# Altium PCB Chip Reader PCB.PcbDoc (part 2 of 2)
Units mm, origin at the board's own origin, x right, y up, seen from the top; angles counter-clockwise.
Board outline 155.1 x 69 mm, 2 copper layers (Top Layer, Bottom Layer), stack 1.6 mm thick; 129 components, 123 nets, 435 pads, 207 vias.
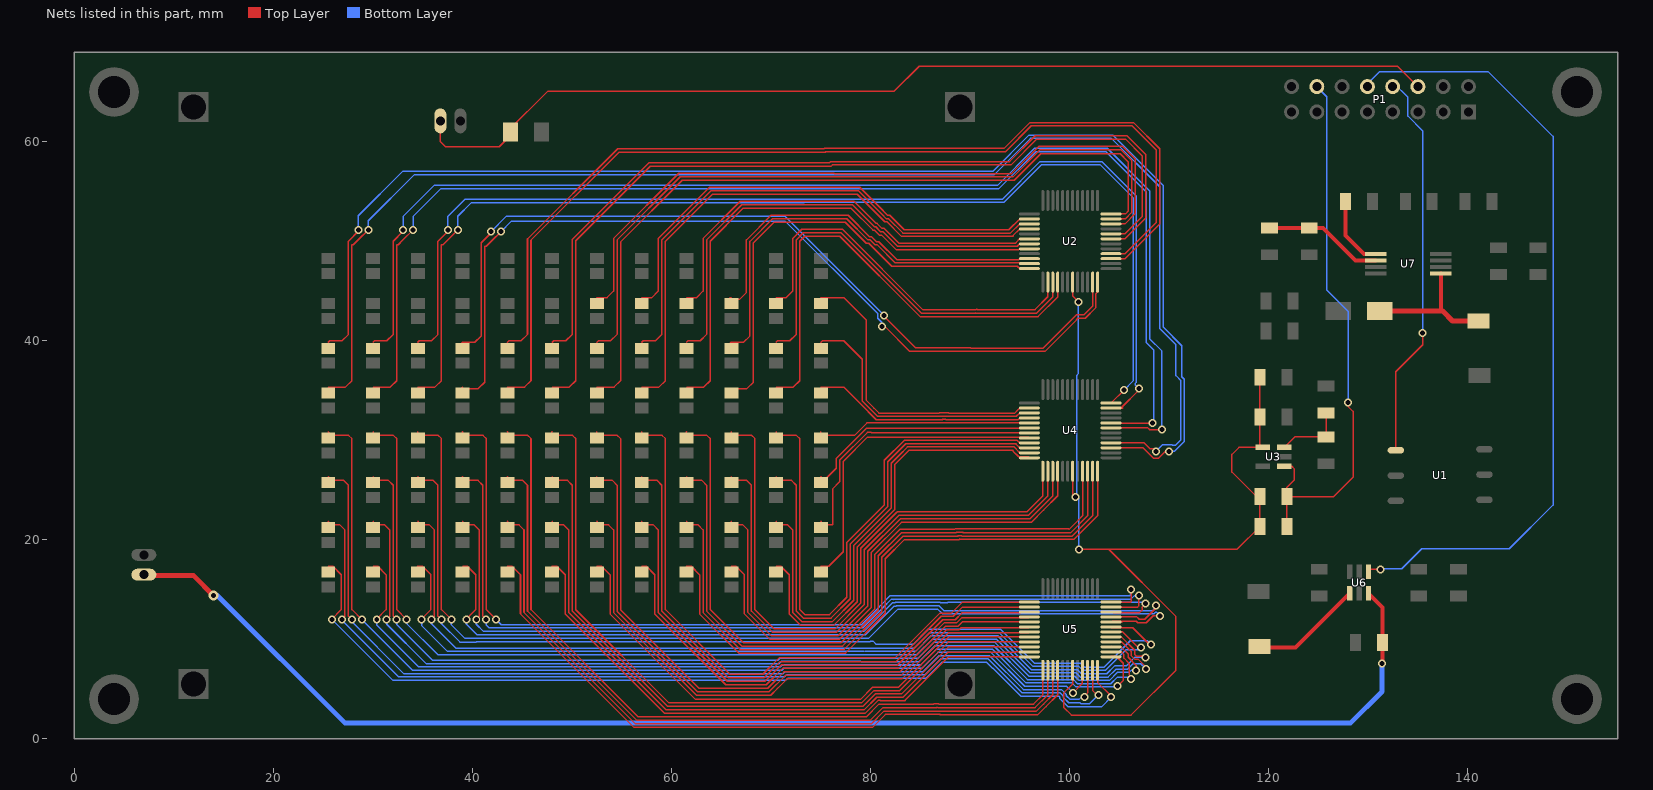
[diagram p2: the nets of this part, all layers, seen from the top]

## Via types
v1: diameter 0.8, hole 0.5, Top Layer to Bottom Layer, 201 vias
v2: diameter 1.27, hole 0.711, Top Layer to Bottom Layer, 4 vias
v3: diameter 1, hole 0.5, Top Layer to Bottom Layer, 2 vias

## Nets (pads, with @x,y where several pads share a name; then routed paths per layer and width w, separated by ;. In a path a pad name is that pad's centre, name@x,y a point inside that pad or via, vN(x,y) a via of type N, cw(c..) or ccw(c..) an arc to the next point about the centre after c; other vN are vias at no path point) (continued)
NetD19_2: D19.2 U2.10 | length 72.4
  Top Layer w0.152: 52.525,44.348 53.545,44.348 54.195,44.998 54.195,50.144 54.195,50.29 60.739,56.834 76.339,56.834 76.373,56.8 94.187,56.8 96.937,59.551 105.342,59.551 106.603,58.29 106.603,52.776 105.575,51.748 U2.10@104.175,51.748
NetD20_2: D20.2 U2.26 | length 48.9
  Top Layer w0.152: 57.025,44.348 58.045,44.348 58.695,44.998 58.695,50.144 58.695,50.29 63.831,55.426 78.94,55.426 81.301,53.066 81.301,53.037 81.498,52.84 81.718,52.62 81.942,52.62 83.406,51.156 93.908,51.156 95,52.248 U2.26@95.975,52.248
NetD21_2: D21.2 U2.30 | length 43.5
  Top Layer w0.152: 61.525,44.348 62.545,44.348 63.195,44.998 63.195,50.144 ; 63.195,50.144 63.195,50.29 66.923,54.018 78.357,54.018 80.583,51.792 80.668,51.792 81.168,51.292 81.392,51.292 82.856,49.828 94.61,49.828 94.67,49.888 94.67,49.918 95,50.248 U2.30@95.975,50.248
NetD22_2: D22.2 U2.34 | length 38.7
  Top Layer w0.152: 65.863,44.348 66.025,44.348 ; D22.2@65.875,44.198 66.895,44.198 67.545,44.848 67.545,49.994 67.545,50.14 70.015,52.61 77.774,52.61 79.92,50.464 80.118,50.464 80.618,49.964 80.842,49.964 82.642,48.164 94.916,48.164 95,48.248 U2.34@95.975,48.248
NetD23_2: D23.2 U2.38 | length 38.6
  Top Layer w0.152: 70.525,44.348 71.545,44.348 72.195,44.998 72.195,50.144 72.195,50.29 73.107,51.202 77.191,51.202 85.247,43.146 90.646,43.146 90.653,43.153 90.747,43.153 90.747,43.146 96.545,43.146 ; 96.575,43.146 96.545,43.146 ; U2.38@97.825,45.898 97.825,44.426 96.545,43.146
NetD24_2: D24.2 U4.26 | length 30.8
  Top Layer w0.152: 75.025,44.348 77.321,44.348 79.603,42.066 79.603,34.005 80.304,33.304 ; 80.36,33.248 80.304,33.304 ; U4.26@95.975,33.248 95,33.248 94.67,32.918 94.67,32.888 94.526,32.744 87.865,32.744 87.841,32.768 86.959,32.768 86.935,32.744 80.864,32.744 80.304,33.304
NetD25_2: D25.2 U4.3 | length 136.1
  Top Layer w0.152: 25.525,39.848 25.675,39.998 26.899,39.998 27.547,40.646 27.547,49.998 28.549,51 v1(28.549,51.148) ; U4.3@104.176,29.25 107.393,29.248 108.419,28.222 108.979,28.222 109.655,28.898 v1(109.999,28.898)
  Bottom Layer w0.152: v1(28.549,51.148) 28.549,52.568 32.999,57.018 92.292,57.018 95.942,60.667 104.358,60.667 109.419,55.607 109.419,41.666 109.419,41.382 111.295,39.506 111.295,36.38 111.538,36.137 111.538,29.884 110.553,28.898 v1(109.999,28.898)
NetD26_2: D26.2 U4.7 | length 123.9
  Top Layer w0.152: 30.025,39.848 30.175,39.998 31.399,39.998 32.047,40.646 32.047,49.998 33.049,51 v1(33.049,51.148) ; U4.7@104.175,31.248 107.893,31.248 108.069,31.072 109.273,31.072 v1(109.299,31.098)
  Bottom Layer w0.152: v1(33.049,51.148) 33.049,52.498 36.161,55.61 92.762,55.61 96.492,59.339 103.808,59.339 108.06,55.088 108.06,40.209 109.299,38.97 v1(109.299,31.098)
NetD27_2: D27.2 U4.11 | length 111.1
  Top Layer w0.152: 34.525,39.848 34.675,39.998 35.899,39.998 36.547,40.646 36.547,49.998 37.549,51 v1(37.549,51.148) ; U4.11@104.175,33.248 105.375,33.248 105.301,33.322 105.251,33.322 106.999,35.07 v1(106.999,35.198)
  Bottom Layer w0.152: v1(37.549,51.148) 37.549,52.526 39.255,54.232 93.262,54.232 97.042,58.011 103.258,58.011 106.732,54.538 106.732,35.835 106.603,35.706 106.603,35.594 v1(106.999,35.198)
NetD28_2: D28.2 U2.47 | length 84
  Top Layer w0.152: D28.2@38.875,39.698 39.025,39.848 40.249,39.848 40.897,40.496 40.897,49.848 41.899,50.85 v1(41.899,50.998) ; v1(81.389,42.548) 81.389,42.448 84.543,39.294 89.994,39.294 90,39.3 90.037,39.3 90.069,39.268 97.371,39.268 97.397,39.294 100.645,42.542 100.705,42.602 101.446,42.602 102.325,43.481 U2.47@102.325,45.898
  Bottom Layer w0.152: v1(41.899,50.998) 43.399,52.498 71.439,52.498 v1(81.389,42.548)
NetD29_2: D29.2 U2.3 | length 95.3
  Top Layer w0.152: 43.525,39.848 43.675,39.998 44.899,39.998 45.547,40.646 45.547,49.998 45.547,50.236 54.61,59.298 75.319,59.298 75.359,59.338 93.438,59.338 96.034,61.934 106.443,61.934 109.067,59.31 109.067,51.74 105.575,48.248 U2.3@104.175,48.248
NetD30_2: D30.2 U2.7 | length 85.3
  Top Layer w0.152: 48.025,39.848 48.175,39.998 49.399,39.998 50.047,40.646 50.047,49.998 50.047,50.176 57.761,57.89 75.902,57.89 76.022,58.01 93.988,58.01 96.576,60.598 105.788,60.598 107.659,58.727 107.659,52.332 105.575,50.248 U2.7@104.175,50.248
NetD31_2: D31.2 U2.11 | length 75.3
  Top Layer w0.152: 52.525,39.848 52.675,39.998 53.899,39.998 54.547,40.646 54.547,49.998 54.547,50.144 60.885,56.482 76.222,56.482 76.236,56.468 94.324,56.468 97.055,59.199 105.196,59.199 106.251,58.144 106.251,52.894 105.605,52.248 U2.11@104.175,52.248
NetD32_2: D32.2 U2.27 | length 53
  Top Layer w0.152: 57.025,39.848 57.175,39.998 58.399,39.998 59.047,40.646 59.047,49.998 59.047,50.144 63.977,55.074 78.794,55.074 81.135,52.734 81.58,52.288 81.805,52.288 83.269,50.824 94.076,50.824 95,51.748 U2.27@95.975,51.748
NetD33_2: D33.2 U2.31 | length 47.6
  Top Layer w0.152: 61.525,39.848 61.675,39.998 62.899,39.998 63.547,40.646 63.547,49.998 63.547,50.144 67.069,53.666 78.211,53.666 80.139,51.738 80.417,51.46 80.53,51.46 81.03,50.96 81.255,50.96 82.719,49.496 94.748,49.496 95,49.748 U2.31@95.975,49.748
NetD34_2: D34.2 U2.35 | length 42.7
  Top Layer w0.152: D34.2@65.875,39.698 66.025,39.848 67.249,39.848 67.897,40.496 67.897,49.848 67.897,49.994 70.161,52.258 77.628,52.258 79.754,50.132 79.98,50.132 80.48,49.632 80.705,49.632 82.505,47.832 95.891,47.832 U2.35@95.975,47.748
NetD35_2: D35.2 U2.39 | length 43.4
  Top Layer w0.152: 70.525,39.848 70.675,39.998 71.899,39.998 72.547,40.646 72.547,49.998 72.547,50.144 73.253,50.85 77.045,50.85 85.101,42.794 90.594,42.794 90.6,42.8 ; 90.601,42.799 90.601,42.794 96.399,42.794 96.721,42.794 98.325,44.398 U2.39@98.325,45.898
NetD36_2: D36.2 U4.27 | length 26.8
  Top Layer w0.152: 75.025,39.848 75.175,39.998 77.321,39.998 79.175,38.144 79.175,33.963 79.271,33.868 80.727,32.412 87.073,32.412 87.097,32.436 87.703,32.436 87.727,32.412 94.664,32.412 95,32.748 U4.27@95.975,32.748
NetD37_2: D37.2 U4.4 | length 138.6
  Top Layer w0.152: 25.525,35.348 27.249,35.348 27.899,35.998 27.899,49.648 28.049,49.648 28.549,50.148 v1(29.549,51.148) ; U4.4@104.175,29.748 107.495,29.748 108.073,29.17 108.427,29.17 v1(108.699,28.898)
  Bottom Layer w0.152: v1(29.549,51.148) 29.549,52.069 34.146,56.666 92.41,56.666 96.079,60.335 104.221,60.335 109.067,55.489 109.067,41.52 109.067,41.237 110.699,39.605 110.699,36.507 111.175,36.031 111.175,30.018 110.679,29.522 110.331,29.522 110.279,29.574 109.375,29.574 v1(108.699,28.898)
NetD38_2: D38.2 U4.8 | length 125.7
  Top Layer w0.152: 30.025,35.348 31.749,35.348 32.399,35.998 32.399,49.648 32.549,49.648 33.049,50.148 v1(34.049,51.148) ; U4.8@104.175,31.748 104.203,31.72 108.321,31.72 v1(108.349,31.748)
  Bottom Layer w0.152: v1(34.049,51.148) 34.049,52.498 36.809,55.258 92.88,55.258 96.629,59.007 103.671,59.007 107.728,54.95 107.728,39.837 108.475,39.09 108.475,31.874 v1(108.349,31.748)
NetD39_2: D39.2 U4.12 | length 112.9
  Top Layer w0.152: 34.525,35.348 36.249,35.348 36.899,35.998 36.899,49.648 37.049,49.648 37.549,50.148 v1(38.549,51.148) ; U4.12@104.175,33.748 v1(105.499,35.072)
  Bottom Layer w0.152: v1(38.549,51.148) 38.549,52.526 39.873,53.85 73.341,53.85 73.391,53.9 93.4,53.9 97.179,57.679 103.121,57.679 106.4,54.4 106.4,35.973 v1(105.499,35.072)
NetD40_2: D40.2 U2.48 | length 89.7
  Top Layer w0.152: 39.025,35.348 38.875,35.198 40.599,35.198 41.249,35.848 41.249,49.498 41.399,49.498 41.899,49.998 v1(42.899,50.998) ; v1(81.149,41.438) 81.459,41.438 83.961,38.936 97.537,38.936 100.697,42.096 100.697,42.124 100.843,42.27 101.583,42.27 102.657,43.344 102.657,44.726 102.825,44.894 U2.48@102.825,45.898
  Bottom Layer w0.152: v1(42.899,50.998) 43.899,51.998 71.469,51.998 80.733,42.734 80.733,42.276 81.149,41.86 v1(81.149,41.438) 81.332,41.438 81.367,41.473 v1@81.367,41.643
NetD41_2: D41.2 U2.4 | length 98.5
  Top Layer w0.152: 43.525,35.348 45.249,35.348 45.899,35.998 45.899,50.118 54.727,58.946 75.465,58.946 75.525,59.006 93.576,59.006 96.172,61.602 106.277,61.602 108.715,59.164 108.715,51.888 105.575,48.748 U2.4@104.175,48.748
NetD42_2: D42.2 U2.8 | length 88.5
  Top Layer w0.152: 48.025,35.348 49.749,35.348 50.399,35.998 50.399,50.058 57.879,57.538 76.048,57.538 76.188,57.678 94.126,57.678 96.714,60.266 105.622,60.266 107.307,58.581 107.307,52.48 105.575,50.748 U2.8@104.175,50.748
NetD43_2: D43.2 U2.12 | length 78.4
  Top Layer w0.152: 52.525,35.348 54.249,35.348 54.899,35.998 54.899,49.938 61.091,56.13 94.456,56.13 97.124,58.798 105.099,58.798 105.899,57.998 105.899,53.011 105.636,52.748 U2.12@104.176,52.75
NetD44_2: D44.2 U2.28 | length 57.3
  Top Layer w0.152: 57.025,35.348 58.749,35.348 59.399,35.998 59.399,49.998 59.419,49.998 64.143,54.722 78.677,54.722 81.443,51.956 81.667,51.956 83.131,50.492 94.305,50.492 94.338,50.525 94.338,50.586 95,51.248 U2.28@95.975,51.248
NetD45_2: D45.2 U2.32 | length 51.9
  Top Layer w0.152: 61.525,35.348 63.249,35.348 63.899,35.998 63.899,50.008 67.205,53.314 78.065,53.314 80.251,51.128 80.393,51.128 80.893,50.628 81.117,50.628 82.581,49.164 94.916,49.164 95,49.248 U2.32@95.975,49.248
NetD46_2: D46.2 U2.36 | length 47.8
  Top Layer w0.152: D46.2@65.875,35.198 67.599,35.198 68.249,35.848 68.249,49.848 68.259,49.848 70.317,51.906 77.482,51.906 79.588,49.8 79.843,49.8 82.143,47.5 94.752,47.5 94.908,47.344 96.49,47.344 U2.36@96.586,47.248
NetD47_2: D47.2 U2.40 | length 48.5
  Top Layer w0.152: 70.525,35.348 72.249,35.348 72.899,35.998 72.899,49.998 73.399,50.498 76.927,50.498 84.995,42.43 90.47,42.43 90.5,42.4 90.5,42.425 90.495,42.43 96.855,42.43 98.825,44.401 U2.40@98.825,45.898
NetD48_2: D48.2 U4.28 | length 22.4
  Top Layer w0.152: 75.025,35.348 77.321,35.348 78.899,33.77 80.589,32.08 87.21,32.08 87.234,32.104 87.566,32.104 87.59,32.08 94.832,32.08 95,32.248 U4.28@95.975,32.248
NetD49_2: D49.2 U5.45 | length 99.9
  Top Layer w0.152: 25.525,30.848 25.875,30.498 27.575,30.498 27.899,30.174 27.899,12.998 v1(28.899,11.998) ; v1(100.346,4.619) 101.299,5.572 101.299,6.872 U5.45@101.325,6.898
  Bottom Layer w0.152: v1(28.899,11.998) 33.995,6.902 71.108,6.902 71.3,7.094 85.185,7.094 86.787,8.696 92.113,8.696 95.513,5.296 99.704,5.296 100.346,4.654 v1(100.346,4.619)
NetD50_2: D50.2 U5.4 | length 105.4
  Top Layer w0.152: 30.025,30.848 30.049,30.848 30.049,30.498 32.075,30.498 32.399,30.174 32.399,12.998 v1(33.399,11.998) ; U5.4@104.175,9.748 104.225,9.698 105.302,9.698 106.232,8.768 106.232,8.338 106.59,7.98 106.929,7.98 107.689,7.22 v1(107.689,7.038)
  Bottom Layer w0.152: v1(33.399,11.998) 33.399,11.608 36.553,8.454 84.667,8.454 86.237,10.024 92.663,10.024 96.063,6.624 100.677,6.624 101.087,6.214 103.878,6.214 104.67,7.006 105.846,7.006 106.39,7.55 107.177,7.55 v1(107.689,7.038)
NetD51_2: D51.2 U5.8 | length 102.9
  Top Layer w0.152: 34.525,30.848 34.52,30.848 34.52,30.498 36.575,30.498 36.899,30.174 36.899,12.998 v1(37.899,11.998) ; U5.8@104.175,11.748 105.375,11.748 105.325,11.798 104.299,11.798 104.323,11.822 106.721,11.822 106.873,11.67 107.725,11.67 108.423,12.368 v1(109.109,12.368)
  Bottom Layer w0.152: v1(37.899,11.998) 37.899,11.458 39.267,10.09 79.301,10.09 79.311,10.1 79.813,10.1 82.765,13.052 86.748,13.052 87.234,12.566 108.506,12.566 108.683,12.742 108.735,12.742 v1(109.109,12.368)
NetD52_2: D52.2 U5.12 | length 90.6
  Top Layer w0.152: 39.025,30.848 39.016,30.848 39.016,30.476 39.041,30.476 39.063,30.498 41.075,30.498 41.399,30.174 41.399,12.998 v1(42.399,11.998) ; U5.12@104.175,13.748 106.149,13.748 106.219,13.818 106.219,14.978 v1@106.189,15.008
  Bottom Layer w0.152: v1(42.399,11.998) 42.919,11.478 79.101,11.478 80.904,13.281 80.904,13.313 81.971,14.38 87.48,14.38 87.5,14.4 87.503,14.397 87.503,14.38 106.051,14.38 106.219,14.548 106.219,14.978 v1@106.189,15.008
  other v1: 106.189,15.008
NetD53_2: D53.2 U5.37 | length 79.3
  Top Layer w0.152: 43.525,30.848 43.562,30.848 43.562,30.498 45.575,30.498 45.899,30.174 45.899,12.998 56.685,2.212 79.587,2.212 80.873,3.498 80.875,3.5 80.9,3.5 80.902,3.498 86.373,3.498 86.407,3.532 86.839,3.532 86.873,3.498 96.399,3.498 97.325,4.424 U5.37@97.325,6.898
NetD54_2: D54.2 U5.33 | length 72.1
  Top Layer w0.152: 48.025,30.848 48.007,30.848 48.007,30.498 50.075,30.498 50.399,30.174 50.399,12.988 59.767,3.62 79.117,3.62 80.354,4.857 82.957,4.857 87.848,9.748 U5.33@95.975,9.748
NetD55_2: D55.2 U5.29 | length 67.2
  Top Layer w0.152: 52.525,30.848 52.503,30.848 52.503,30.476 52.554,30.476 52.575,30.498 54.575,30.498 54.899,30.174 54.899,12.978 62.787,5.09 69.68,5.09 71.318,6.728 82.95,6.728 87.542,11.32 88.799,11.32 89.227,11.748 U5.29@95.975,11.748
NetD56_2: D56.2 U5.25 | length 62.3
  Top Layer w0.152: 57.025,30.848 57.05,30.848 57.05,30.498 59.075,30.498 59.399,30.174 59.399,12.998 65.899,6.498 69.182,6.498 70.82,8.136 82.48,8.136 86.992,12.648 88.148,12.648 89.248,13.748 U5.25@95.975,13.748
NetD57_2: D57.2 U4.45 | length 71.8
  Top Layer w0.152: 61.525,30.848 61.52,30.848 61.52,30.498 63.575,30.498 63.899,30.174 63.899,12.998 67.215,9.682 77.065,9.682 80.447,13.064 80.447,18.539 82.954,21.046 82.962,21.054 88.462,21.054 88.504,21.096 99.913,21.096 99.955,21.054 100.899,21.998 101.325,22.424 U4.45@101.325,26.898
NetD58_2: D58.2 U4.37 | length 61.1
  Top Layer w0.152: 66.025,30.848 66.016,30.848 66.016,30.476 66.041,30.476 66.063,30.498 68.075,30.498 68.399,30.174 68.399,12.988 70.297,11.09 76.482,11.09 79.039,13.647 79.039,19.147 82.66,22.768 ; 82.704,22.812 82.66,22.768 ; U4.37@97.325,26.898 97.325,24.417 95.719,22.812 82.732,22.812 82.66,22.74 82.66,22.768
NetD59_2: D59.2 U4.33 | length 56.5
  Top Layer w0.152: 70.525,30.848 70.562,30.848 70.562,30.498 72.575,30.498 72.899,30.174 72.899,12.998 73.399,12.498 75.899,12.498 77.631,14.23 77.631,19.73 81.399,23.498 81.399,27.998 83.397,29.996 94.756,29.996 95.004,29.748 U4.33@95.975,29.748
NetD60_2: D60.2 U4.29 | length 21.9
  Top Layer w0.152: 75.025,30.848 75.007,30.848 75.007,30.498 78.399,30.498 79.649,31.748 81.91,31.748 87.348,31.748 87.372,31.772 87.386,31.772 87.41,31.748 U4.29@95.975,31.748
NetD61_2: D61.2 U5.46 | length 97.8
  Top Layer w0.152: 25.525,26.348 25.875,25.998 27.075,25.998 27.075,25.97 27.547,25.498 27.547,12.35 v1(27.899,11.998) ; v1(101.5,4.2) 101.4,4.2 101.825,4.625 U5.46@101.825,6.898
  Bottom Layer w0.152: v1(27.899,11.998) 27.899,11.768 33.097,6.57 71.245,6.57 71.437,6.762 85.323,6.762 86.925,8.364 91.975,8.364 95.375,4.964 99.198,4.964 99.69,4.472 99.69,4.347 100.074,3.963 100.963,3.963 101.3,4.3 v1@101.5,4.3
NetD62_2: D62.2 U5.3 | length 99.5
  Top Layer w0.152: 30.025,26.348 30.049,26.348 30.049,25.998 31.575,25.998 31.575,25.97 32.047,25.498 32.047,12.35 v1(32.399,11.998) ; U5.3@104.212,9.285 U5.3@104.249,9.248 ; U5.3@104.211,9.286 104.199,9.298 104.175,9.274 U5.3@104.176,9.25 U5.3@104.249,9.248 ; v1(106.709,6.894) 106.721,6.906 106.721,7.379 105.9,8.2 105.9,8.538 105.19,9.248 U5.3@104.249,9.248
  Bottom Layer w0.152: v1(32.399,11.998) 32.399,11.498 35.999,7.898 70.695,7.898 70.909,8.112 79.207,8.112 79.207,8.107 79.2,8.1 84.783,8.1 86.375,9.692 92.525,9.692 95.925,6.292 100.539,6.292 100.949,5.882 104.016,5.882 104.808,6.674 105.984,6.674 106.226,6.916 106.721,6.916 106.721,6.906 v1(106.709,6.894)
NetD63_2: D63.2 U5.7 | length 97.2
  Top Layer w0.152: 34.525,26.348 34.545,26.348 34.545,25.998 36.075,25.998 36.075,25.97 36.547,25.498 36.547,12.35 v1(36.899,11.998) ; U5.7@104.175,11.248 104.249,11.174 106.367,11.174 108.119,9.422 108.183,9.422 108.199,9.438 v1(108.199,9.478)
  Bottom Layer w0.152: v1(36.899,11.998) 36.899,11.578 38.75,9.727 40.415,9.727 40.447,9.758 79.94,9.758 79.982,9.8 80.3,9.8 80.6,9.5 84.305,9.5 85.825,11.02 93.08,11.02 95.9,8.2 95.9,8.195 96.475,7.62 101.089,7.62 101.499,7.21 103.466,7.21 106.112,9.856 107.821,9.856 v1(108.199,9.478)
NetD64_2: D64.2 U5.11 | length 87.8
  Top Layer w0.152: 39.025,26.348 39.016,26.348 39.016,25.981 39.041,25.981 39.058,25.998 40.575,25.998 40.575,25.97 41.047,25.498 41.047,12.35 v1(41.399,11.998) ; U5.11@104.175,13.248 106.849,13.248 106.969,13.368 v1(106.969,14.398)
  Bottom Layer w0.152: v1(41.399,11.998) 41.399,11.458 41.711,11.146 79.238,11.146 81.236,13.144 81.236,13.175 82.109,14.048 82.352,14.048 ; 82.304,14 82.352,14.048 ; v1(106.969,14.398) 106.539,14.398 106.189,14.048 82.352,14.048
NetD65_2: D65.2 U5.38 | length 75.7
  Top Layer w0.152: 43.525,26.348 43.562,26.348 43.562,25.998 45.075,25.998 45.075,25.97 45.547,25.498 45.547,12.998 45.547,12.852 56.539,1.86 79.969,1.86 81.255,3.146 86.646,3.146 86.7,3.2 ; 86.701,3.2 86.755,3.146 96.545,3.146 97.825,4.426 U5.38@97.825,6.898
NetD66_2: D66.2 U5.34 | length 67.6
  Top Layer w0.152: 48.025,26.348 48.058,26.348 48.058,25.998 49.575,25.998 49.575,25.97 50.047,25.498 50.047,12.998 50.047,12.852 59.631,3.268 79.234,3.268 80.492,4.525 83.125,4.525 87.848,9.248 94.575,9.248 U5.34@95.975,9.248
NetD67_2: D67.2 U5.30 | length 62.8
  Top Layer w0.152: 52.525,26.348 52.503,26.348 52.503,25.981 52.554,25.981 52.571,25.998 54.075,25.998 54.075,25.97 54.547,25.498 54.547,12.998 54.547,12.83 62.639,4.738 69.826,4.738 71.464,6.376 83.067,6.376 87.679,10.988 88.937,10.988 89.105,11.156 95.883,11.156 U5.30@95.975,11.248
NetD68_2: D68.2 U5.26 | length 57.9
  Top Layer w0.152: 57.025,26.348 57.05,26.348 57.05,25.998 58.575,25.998 58.575,25.97 59.047,25.498 59.047,12.998 59.047,12.852 65.753,6.146 69.299,6.146 70.929,7.775 71.416,7.775 71.431,7.761 82.574,7.761 87.129,12.316 88.316,12.316 89.25,13.25 U5.26@95.976,13.25
NetD69_2: D69.2 U4.46 | length 68.1
  Top Layer w0.152: 61.525,26.348 61.545,26.348 61.545,25.998 63.075,25.998 63.075,25.97 63.547,25.498 63.547,12.998 63.547,12.852 67.069,9.33 77.211,9.33 80.799,12.918 80.799,18.394 83.107,20.702 ; 83.109,20.704 83.107,20.702 ; U4.46@101.825,26.898 101.825,22.426 100.103,20.704 89.335,20.704 89.275,20.764 88.669,20.764 88.605,20.7 88.6,20.7 88.598,20.702 83.107,20.702
NetD70_2: D70.2 U4.38 | length 57.3
  Top Layer w0.152: 66.025,26.348 66.016,26.348 66.016,25.981 66.041,25.981 66.059,25.998 67.575,25.998 67.575,25.97 68.047,25.498 68.047,12.998 68.047,12.852 70.161,10.738 76.628,10.738 79.391,13.501 79.391,19.001 82.85,22.46 82.87,22.48 88.33,22.48 88.35,22.46 95.865,22.46 97.825,24.42 U4.38@97.825,26.898
NetD71_2: D71.2 U4.34 | length 52.3
  Top Layer w0.152: 70.525,26.348 70.562,26.348 70.562,25.998 72.075,25.998 72.075,25.97 72.547,25.498 72.547,12.998 72.547,12.852 73.253,12.146 76.045,12.146 77.983,14.084 77.983,19.584 81.751,23.352 81.751,27.852 82.648,28.749 83.563,29.664 94.618,29.664 94.67,29.612 94.67,29.582 95.004,29.248 U4.34@95.975,29.248
NetD72_2: D72.2 U4.30 | length 24.1
  Top Layer w0.152: 75.025,26.348 75.058,26.348 75.058,25.998 75.375,25.998 76.517,27.14 76.575,27.14 76.575,28.176 79.637,31.238 95.965,31.238 U4.30@95.975,31.248
NetD73_2: D73.2 U5.47 | length 95.5
  Top Layer w0.152: 25.525,21.848 25.875,21.498 26.695,21.498 27.195,20.998 27.195,12.294 v1(26.899,11.998) ; U5.47@102.326,6.9 102.326,4.874 102.9,4.3 v1(102.9,4.4)
  Bottom Layer w0.152: v1(26.899,11.998) 26.899,11.918 32.579,6.238 71.383,6.238 71.575,6.43 85.46,6.43 87.062,8.032 91.838,8.032 95.238,4.632 99.06,4.632 99.358,4.334 99.358,4.209 99.937,3.631 101.069,3.631 101.156,3.544 102.044,3.544 v1(102.9,4.4)
NetD74_2: D74.2 U5.2 | length 95.2
  Top Layer w0.152: 30.025,21.848 30.049,21.848 30.049,21.498 31.195,21.498 31.695,20.998 31.695,12.294 v1(31.399,11.998) ; U5.2@104.175,8.748 105.22,8.748 105.482,8.486 105.482,8.118 105.999,7.601 105.999,6.418 106.199,6.218 v1(106.199,6.018)
  Bottom Layer w0.152: v1(31.399,11.998) 31.399,11.528 35.361,7.566 70.833,7.566 71.047,7.78 79.05,7.78 79.062,7.768 84.92,7.768 86.512,9.36 92.388,9.36 95.788,5.96 100.402,5.96 100.812,5.55 104.153,5.55 104.821,6.218 106.199,6.218 v1(106.199,6.018)
NetD75_2: D75.2 U5.6 | length 91.6
  Top Layer w0.152: 34.525,21.848 34.545,21.848 34.545,21.498 35.695,21.498 36.195,20.998 36.195,12.294 v1(35.899,11.998) ; U5.6@104.175,10.748 105.349,10.748 107.019,9.078 107.133,9.078 107.2,9.145 v1(107.2,9.2) ; v1(107.2,9.2) 107.119,9.12 v1(107.2,9.2)
  Bottom Layer w0.152: v1(35.899,11.998) 35.899,11.568 38.349,9.118 84.392,9.118 85.962,10.688 92.938,10.688 96.338,7.288 100.952,7.288 101.362,6.878 103.603,6.878 105.693,8.968 107.023,8.968 107.2,9.145 v1(107.2,9.2) ; v1(107.2,9.2) 107.119,9.12 v1(107.2,9.2)
NetD76_2: D76.2 U5.10 | length 84.7
  Top Layer w0.152: 39.025,21.848 39.041,21.848 39.041,21.498 40.195,21.498 40.695,20.998 40.695,12.294 v1(40.399,11.998) ; U5.10@104.176,12.75 104.349,12.748 104.399,12.698 107.048,12.698 107.338,12.988 107.338,13.169 107.289,13.218 107.629,13.558 v1(107.629,13.628)
  Bottom Layer w0.152: v1(40.399,11.998) 40.399,11.518 41.123,10.794 79.066,10.794 79.068,10.796 79.358,10.796 81.568,13.006 81.568,13.038 82.198,13.668 82.442,13.668 82.49,13.716 87.023,13.716 87.039,13.7 87.762,13.7 87.778,13.716 ; 87.8,13.716 107.541,13.716 v1(107.629,13.628)
NetD77_2: D77.2 U5.39 | length 73
  Top Layer w0.152: 43.525,21.848 43.562,21.848 43.562,21.498 44.695,21.498 45.195,20.998 45.195,12.852 45.195,12.706 56.393,1.508 80.087,1.508 81.379,2.8 81.4,2.8 81.406,2.794 96.691,2.794 97.397,3.5 97.401,3.5 98.329,4.428 98.329,5.628 ; 98.325,4.572 U5.39@98.325,6.898
NetD78_2: D78.2 U5.35 | length 63.3
  Top Layer w0.152: 48.025,21.848 48.058,21.848 48.058,21.498 49.195,21.498 49.695,20.998 49.695,12.852 49.695,12.706 59.485,2.916 79.352,2.916 80.629,4.193 81.116,4.193 81.122,4.188 83.288,4.188 87.8,8.7 94.6,8.7 94.6,8.723 94.575,8.748 U5.35@95.975,8.748
NetD79_2: D79.2 U5.31 | length 58.4
  Top Layer w0.152: 52.525,21.848 52.554,21.848 52.554,21.498 53.695,21.498 54.195,20.998 54.195,12.852 54.195,12.706 62.515,4.386 69.986,4.386 70.657,5.057 70.657,5.071 71.61,6.024 83.185,6.024 87.817,10.656 95.883,10.656 U5.31@95.975,10.748
NetD80_2: D80.2 U5.27 | length 53.6
  Top Layer w0.152: 57.025,21.848 57.05,21.848 57.05,21.498 58.195,21.498 58.695,20.998 58.695,12.852 58.695,12.706 65.607,5.794 69.417,5.794 71.067,7.443 71.279,7.443 71.31,7.412 82.695,7.412 87.267,11.984 88.524,11.984 89.196,12.656 95.056,12.656 95.15,12.75 U5.27@95.976,12.75
NetD81_2: D81.2 U4.47 | length 64.5
  Top Layer w0.152: 61.525,21.848 61.545,21.848 61.545,21.498 62.695,21.498 63.195,20.998 63.195,12.852 ; 63.195,12.852 63.195,12.706 66.923,8.978 77.357,8.978 81.151,12.772 81.151,18.248 83.271,20.368 88.771,20.368 88.835,20.432 89.138,20.432 89.198,20.372 100.269,20.372 102.325,22.428 U4.47@102.325,26.898
NetD82_2: D82.2 U4.39 | length 53.6
  Top Layer w0.152: 66.025,21.848 66.041,21.848 66.041,21.498 67.195,21.498 67.695,20.998 67.695,12.852 67.695,12.706 70.015,10.386 76.774,10.386 79.743,13.355 79.743,18.855 82.996,22.108 96.011,22.108 98.325,24.422 U4.39@98.325,26.898
NetD83_2: D83.2 U4.35 | length 48.1
  Top Layer w0.152: 70.525,21.848 70.562,21.848 70.562,21.498 71.695,21.498 72.195,20.998 72.195,12.852 72.195,12.706 73.107,11.794 76.191,11.794 78.335,13.938 78.335,19.438 82.103,23.206 82.103,27.706 82.897,28.5 83.729,29.332 94.45,29.332 94.67,29.112 94.67,29.082 95.004,28.748 U4.35@95.975,28.748
NetD84_2: D84.2 U4.31 | length 28.6
  Top Layer w0.152: 75.025,21.848 75.058,21.848 75.058,21.498 76.195,21.498 76.195,25.12 76.927,25.852 76.927,28.03 79.697,30.8 80.096,30.8 80.148,30.748 U4.31@95.975,30.748
NetD85_2: D85.2 U5.48 | length 93.7
  Top Layer w0.152: 25.525,17.348 25.993,17.348 26.843,16.498 26.843,12.998 25.899,12.054 v1(25.899,11.998) ; U5.48@102.826,6.9 102.826,5.674 104.2,4.3 v1(104.2,4.2)
  Bottom Layer w0.152: v1(25.899,11.998) 31.991,5.906 71.52,5.906 71.712,6.098 85.598,6.098 87.2,7.7 91.662,7.7 92.272,7.09 92.31,7.09 95.1,4.3 98.923,4.3 99.026,4.197 99.026,4.072 99.886,3.212 103.212,3.212 v1(104.2,4.2)
NetD86_2: D86.2 U5.1 | length 89.9
  Top Layer w0.152: 30.025,17.348 30.493,17.348 31.343,16.498 31.343,12.998 30.399,12.054 v1(30.399,11.998) ; U5.1@104.175,8.298 104.699,8.298 105.399,7.598 105.399,5.868 v1(104.849,5.318)
  Bottom Layer w0.152: v1(30.399,11.998) 30.399,11.458 34.623,7.234 70.97,7.234 71.162,7.426 85.048,7.426 86.65,9.028 92.25,9.028 95.65,5.628 100.264,5.628 100.674,5.218 104.447,5.218 104.703,5.474 104.833,5.474 104.849,5.458 v1(104.849,5.318)
NetD87_2: D87.2 U5.5 | length 88.5
  Top Layer w0.152: 34.469,17.348 34.993,17.348 35.843,16.498 35.843,12.998 34.899,12.054 v1(34.899,11.998) ; U5.5@104.175,10.248 105.222,10.248 106.564,8.906 106.564,8.475 106.727,8.312 107.271,8.312 107.307,8.348 107.489,8.348 v1(107.639,8.198)
  Bottom Layer w0.152: v1(34.899,11.998) 34.899,11.388 37.501,8.786 79.4,8.786 ; 79.472,8.786 84.53,8.786 86.1,10.356 92.8,10.356 96.2,6.956 100.814,6.956 101.224,6.546 103.741,6.546 104.533,7.338 105.709,7.338 106.599,8.228 107.609,8.228 v1(107.639,8.198)
NetD88_2: D88.2 U5.9 | length 84
  Top Layer w0.152: 39.025,17.348 39.493,17.348 40.343,16.498 40.343,12.998 39.399,12.054 v1(39.399,11.998) ; U5.9@104.176,12.25 104.249,12.248 U5.9@104.212,12.285 ; U5.9@104.211,12.285 104.199,12.298 106.743,12.298 107.019,12.022 107.579,12.022 108.679,13.122 v1(108.679,13.398)
  Bottom Layer w0.152: v1(39.399,11.998) 39.399,11.548 40.505,10.442 79.184,10.442 79.206,10.464 79.495,10.464 82.367,13.336 82.579,13.336 82.627,13.384 86.886,13.384 87.372,12.898 108.369,12.898 108.679,13.208 v1(108.679,13.398)
NetD89_2: D89.2 U5.40 | length 68.2
  Top Layer w0.152: 43.525,17.348 43.993,17.348 44.843,16.498 44.843,12.561 56.248,1.156 80.204,1.156 81.51,2.462 87,2.462 87,2.452 86.99,2.442 96.836,2.442 97.646,3.251 98.825,4.431 U5.40@98.825,6.898
NetD90_2: D90.2 U5.36 | length 58.1
  Top Layer w0.152: 47.976,17.348 48.493,17.348 49.343,16.498 49.343,12.561 59.34,2.564 79.469,2.564 80.767,3.861 80.979,3.861 80.984,3.856 83.5,3.856 83.5,3.9 87.848,8.248 U5.36@95.259,8.248
NetD91_2: D91.2 U5.32 | length 53.9
  Top Layer w0.152: 52.525,17.348 52.993,17.348 53.843,16.498 53.843,12.561 62.432,3.972 78.999,3.972 80.216,5.189 82.82,5.189 87.878,10.248 U5.32@95.975,10.248
NetD92_2: D92.2 U5.28 | length 49
  Top Layer w0.152: 57.025,17.348 57.493,17.348 58.343,16.498 58.343,12.561 65.462,5.442 69.535,5.442 71.173,7.08 82.832,7.08 87.404,11.652 88.662,11.652 89.166,12.156 95.883,12.156 U5.28@95.975,12.248
NetD93_2: D93.2 U4.48 | length 60.8
  Top Layer w0.152: 61.482,17.348 61.993,17.348 62.843,16.498 62.843,12.561 66.778,8.626 77.503,8.626 81.503,12.626 81.503,18.102 83.437,20.036 88.936,20.036 89,20.1 ; 89,20.099 88.941,20.04 100.434,20.04 102.825,22.431 U4.48@102.825,26.898
NetD94_2: D94.2 U4.40 | length 49.8
  Top Layer w0.152: 66.025,17.348 66.493,17.348 67.343,16.498 67.343,12.561 69.87,10.034 76.92,10.034 80.095,13.209 80.095,18.738 83.113,21.756 96.157,21.756 97.399,22.998 98.825,24.424 U4.40@98.825,26.898
NetD95_2: D95.2 U4.36 | length 43.7
  Top Layer w0.152: 70.525,17.348 70.993,17.348 71.843,16.498 71.843,12.561 72.962,11.442 76.336,11.442 78.687,13.793 78.687,19.293 82.455,23.061 82.455,27.561 83.894,29 94.313,29 94.338,28.975 94.338,28.914 94.908,28.344 95.879,28.344 U4.36@95.975,28.248
NetD96_2: D96.2 U4.32 | length 31.7
  Top Layer w0.152: 75.025,17.348 75.825,17.348 77.279,18.802 77.279,27.885 79.722,30.328 95.895,30.328 U4.32@95.975,30.248
NetD97_1: D97.1 L3.2 U7.5 | length 13.2
  Top Layer w0.152: 137.314,43.183 137.499,42.998
  Top Layer w0.4: 137.314,43.183 U7.5@137.314,46.783
  Top Layer w0.5: D97.1@132.175,42.998 137.499,42.998 138.499,41.998 141.002,41.998 141.004,42 L3.2@141.1,42
NetL2_2: L2.2 U6.1 | length 11.4
  Top Layer w0.4: L2.2@119.1,9.3 119.1,9.2 122.726,9.2 U6.1@128.149,14.623
NetP1_11: P1.11 R7.1 RT1.2 | length 105.8
  Top Layer w0.152: RT1.2@36.8,62.1 36.8,60 37.3,59.5 42.7,59.5 R7.1@44.2,61 ; R7.1@43.85,61 43.5,61 47.6,65.1 82.4,65.1 84.9,67.6 132.96,67.6 P1.11@135.02,65.54
NetP1_12: P1.12 U1.1 | length 40
  Top Layer w0.152: U1.1@132.8,29 132.8,36.9 135.5,39.6 v1(135.5,40.8)
  Bottom Layer w0.152: P1.12@132.147,65.4 132.147,65.676 132.341,65.87 132.617,65.87 134.014,64.473 134.014,62.583 135.5,61.097 v1(135.5,40.8)
NetP1_13: P1.13 U6.4 | length 80.7
  Top Layer w0.152: U6.4@130.049,16.773 130.306,17.03 v1(131.249,17.03)
  Bottom Layer w0.152: P1.13@129.939,65.538 129.939,65.825 131.175,67.061 142.072,67.061 148.599,60.534 148.599,23.5 144.199,19.1 135.4,19.1 133.4,17.1 v1@131.1,17.1
NetP3_2: P3.2 R3.2 U6.3 | length 142.4
  Top Layer w0.4: U6.3@130.049,14.623 131.449,13.223 v1@131.449,7.594
  Top Layer w0.5: P3.2@6.9,16.4 12,16.4 v3(14,14.4)
  Bottom Layer w0.152: v1@131.419,7.474 131.419,7.481 v1(131.419,7.564)
  Bottom Layer w0.5: v3(14,14.4) 14.4,14.4 27.221,1.579 128.224,1.579 131.4,4.755 131.4,7.5 v1@131.419,7.481
NetR4_1: R4.1 R5.2 U7.2 | length 12
  Top Layer w0.4: R5.2@120.099,51.348 124.099,51.348 125.463,51.348 128.728,48.083 U7.2@130.764,48.083
NetR6_2: R6.2 U7.1 | length 7.2
  Top Layer w0.4: R6.2@127.75,54 127.749,50.578 129.594,48.733 U7.1@130.764,48.733
NetR100_1: R100.1 R101.2 U3.3 | length 7.5
  Top Layer w0.152: U3.3@121.95,29.3 U3.3@121.6,29.3 ; R100.1@125.8,32.8 R100.1@125.8,32.75 R101.2@125.8,30.35 122.65,30.35 U3.3@121.6,29.3 ; U3.3@121.6,29.3 121.575,29.3 U3.3@121.565,29.29 121.59,29.29 U3.3@121.6,29.3
PD_IN: C4.1 C5.2 R1.2 R2.2 U2.43 U3.4 U4.43 U5.43 | length 100.7
  Top Layer w0.152: U5.43@100.325,6.898 100.325,5.524 100.076,5.275 100.074,5.275 99.413,4.613 99.413,3.184 100.199,2.398 106.199,2.398 110.699,6.898 110.699,12.306 103.955,19.05 ; U4.43@100.325,26.898 100.325,24.572 v1(100.599,24.298) ; U2.43@100.325,45.898 100.325,44.496 v1(100.899,43.922) ; v1(100.951,19.05) 103.955,19.05 ; R2.2@119.139,36.338 119.139,29.563 119.414,29.288 117.031,29.288 116.325,28.582 116.325,26.812 119.139,23.998 119.139,21.338 116.851,19.05 103.955,19.05
  Bottom Layer w0.152: v1(100.599,24.298) v1@100.699,24.398 ; v1(100.899,43.922) 100.869,43.892 100.869,36.668 100.751,36.55 100.751,24.45 v1@100.699,24.398 ; v1(100.951,19.05) 100.951,24.146 v1@100.699,24.398
PD_OUT: C4.2 P1.15 R1.1 U3.1 | length 55.6
  Top Layer w0.152: U3.1@121.564,27.388 122.33,27.388 122.611,27.107 122.611,26.036 121.839,25.264 R1.1@121.84,24.34 C4.2@121.839,21.338 ; R1.1@121.84,24.34 126.54,24.34 128.5,26.3 128.5,32.9 128,33.4 v1@128,33.9
  Bottom Layer w0.152: P1.15@124.859,65.538 125.866,64.531 125.866,62.583 125.865,62.582 125.865,45.109 128,42.974 v1(128,33.8)
pads on no net: RT1.1 U1.3 U2.41 U2.42 U2.44 U4.41 U4.42 U4.44 U5.41 U5.42 U5.44
copper on no net: | length 0
  Bottom Layer w0.152: 128.241,46.637 128.249,46.645

## Polygon pours and split planes (outlines as drawn)
GND on Bottom Layer "Ground Plane" (solid, remove dead copper, pour order 1000): 154.499,0.498 154.472,0.522 154.472,68.498 0.499,68.498 0.499,0.498 154.472,0.498

## Silkscreen, mask and mechanical layers (free items; w line width, h text height)
Top Overlay:
  drawing of 17 lines, arcs and shapes, not listed
  text "BioPOETS Lab" at 132.3,3.1 h2.5
  text "Microfluidic Bioamplification Reader (   BAR)  v.2          UC Berkeley          2011" at 13.4,1.5 h2.5
  text "m" at 50.1,1.5 h2.5
  text "FBM/RHH" at 133.4,1 h2.5
Board Outline (M1):
  lines w0.152: 0,0 0,69 155,69 155,0 0,0
Mechanical 2:
  lines w0.254: -14,-5 160,-5 160,82 -14,82 -14,-5 ; -11,-2 157,-2 157,79 -11,79 -11,-2